# Altium PCB PCB.PcbDoc
Units mil, origin at the board's own origin, x right, y up, seen from the top; angles counter-clockwise.
Board outline 2500 x 2400 mil, 2 copper layers (Top Layer, Bottom Layer); 109 components, 42 nets, 290 pads, 50 vias.
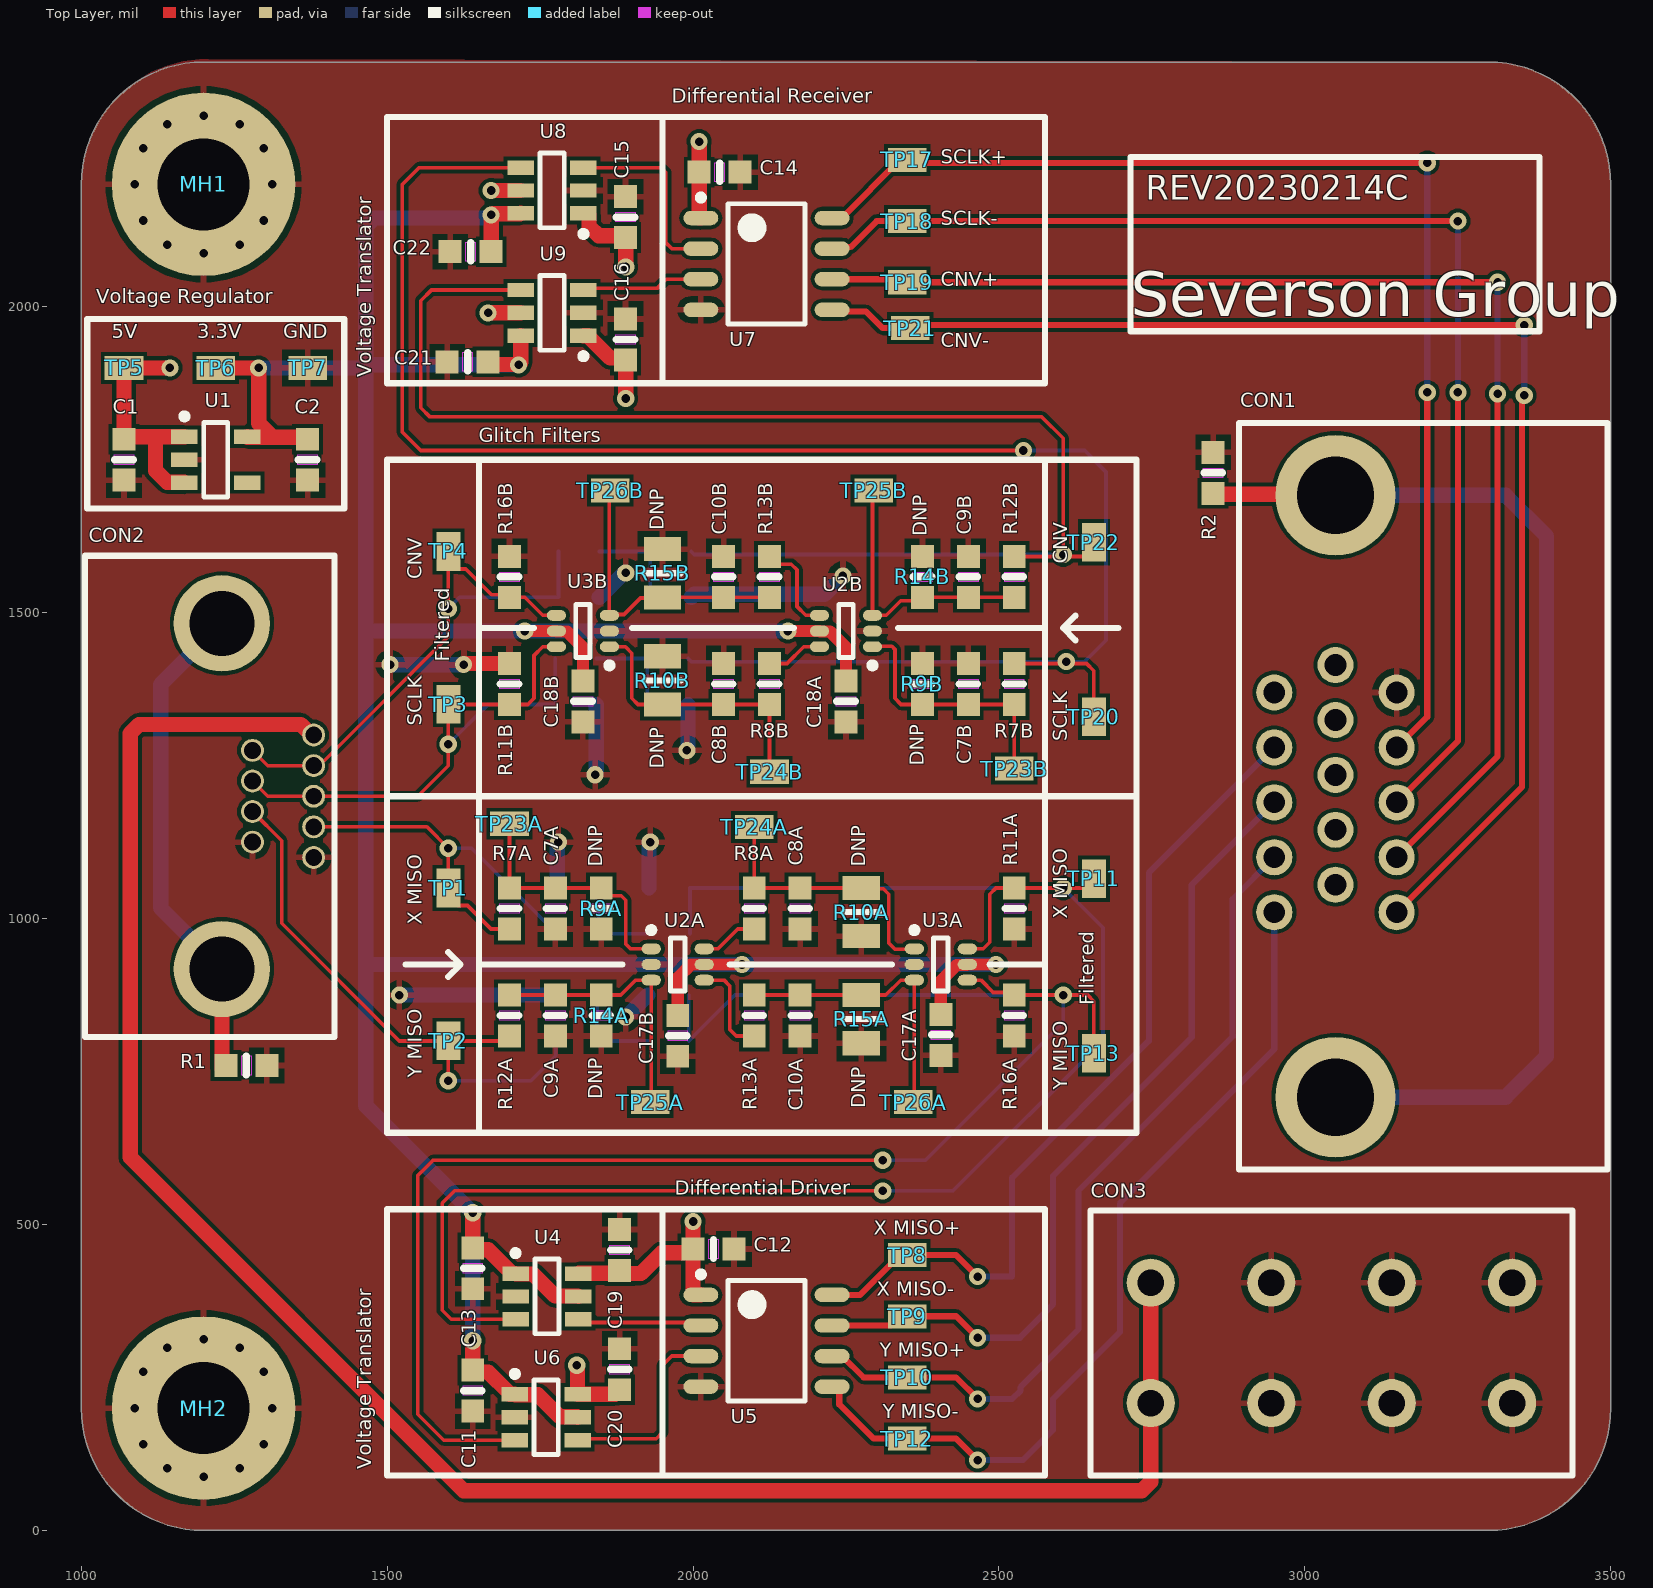
[diagram p0: Top Layer view]
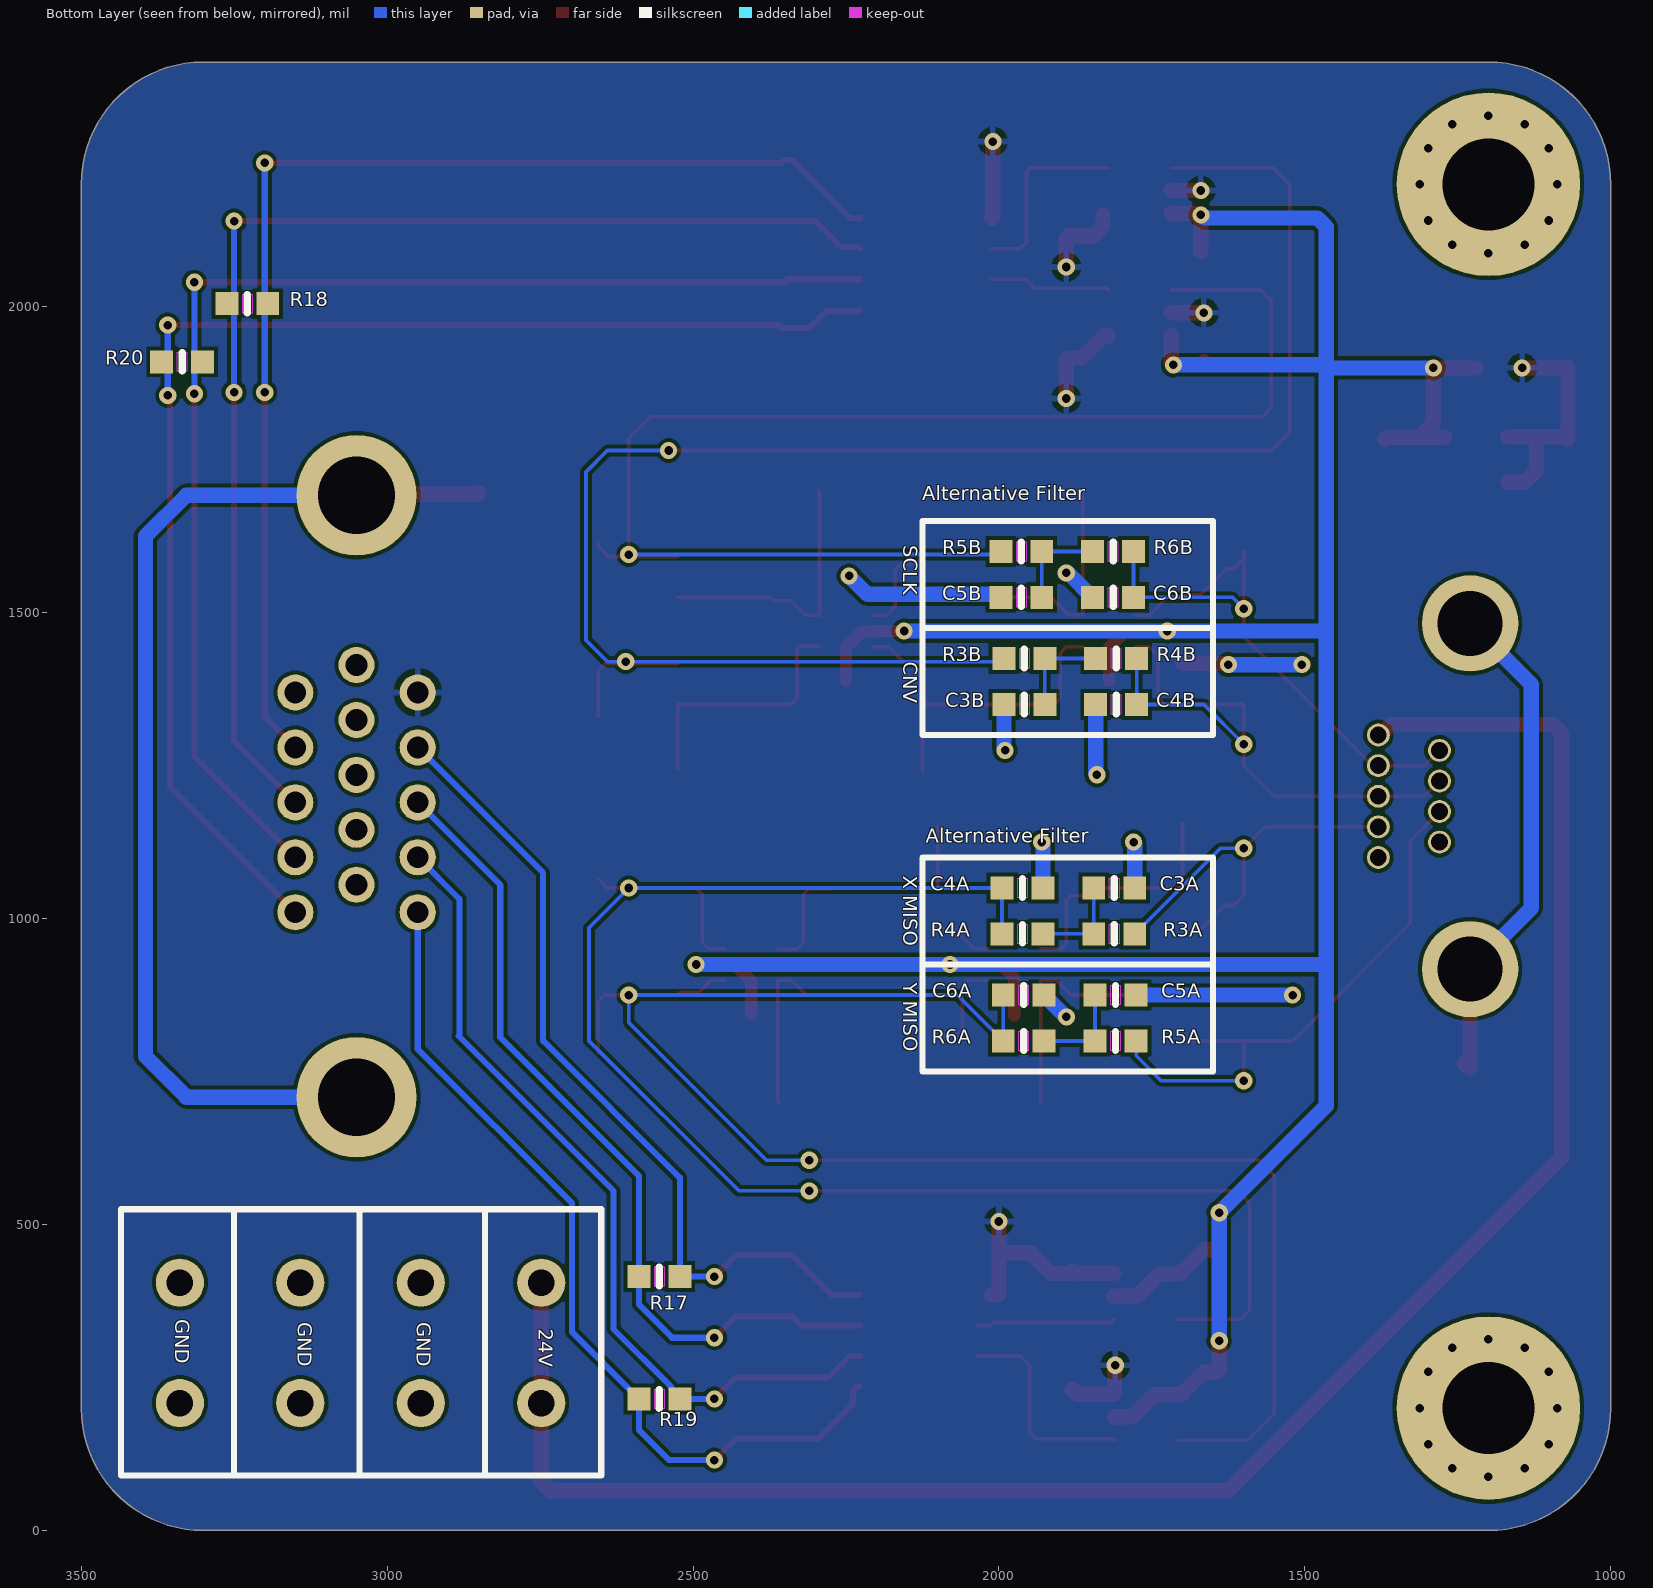
[diagram p1: Bottom Layer view, seen from below]
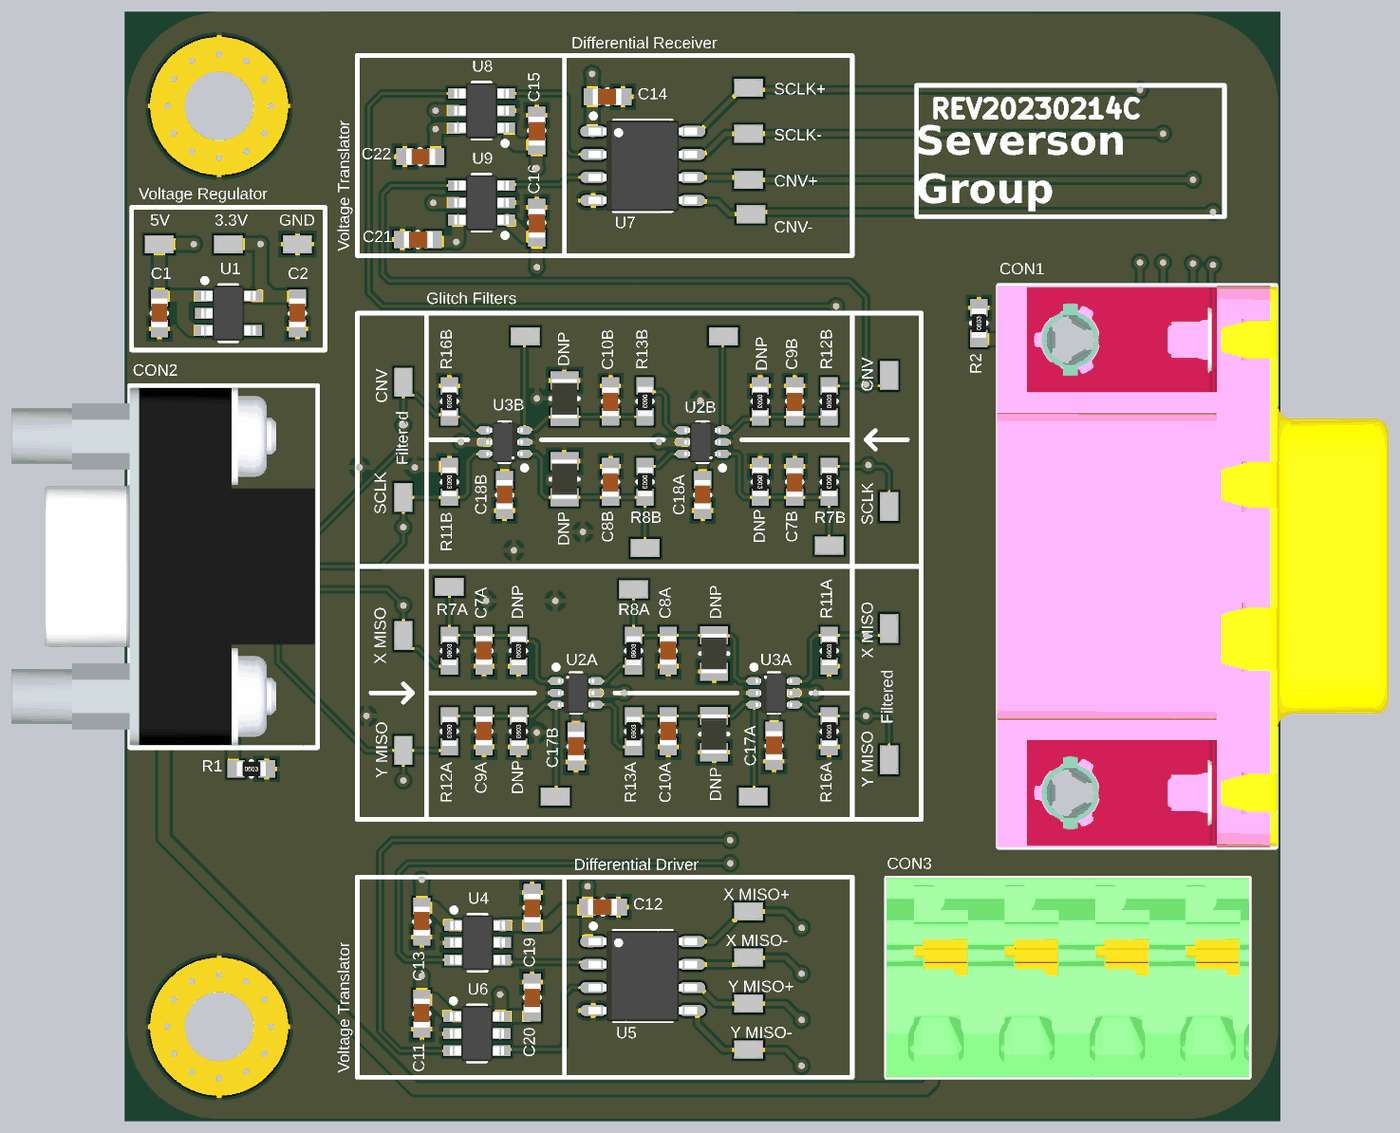
[diagram p2: 3D render of the assembled board from above, using the file's embedded part models]
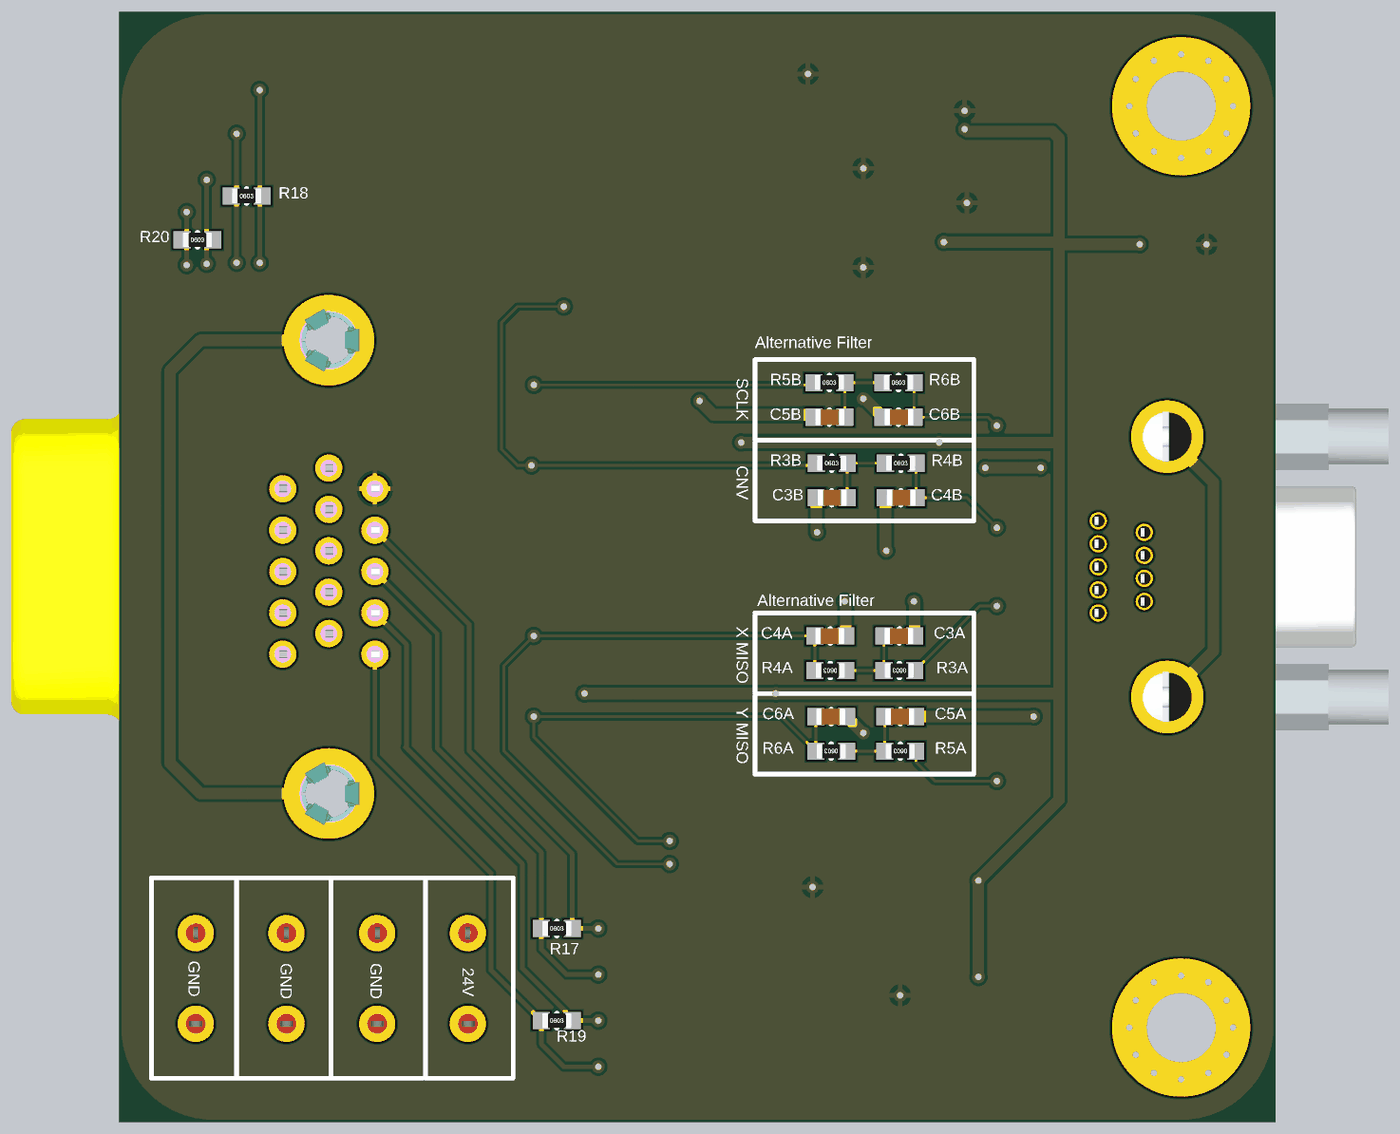
[diagram p3: 3D render of the assembled board from below, using the file's embedded part models]

## Layer stack, top to bottom
Top Solder: solder mask 0.4, Solder Resist, Dk 3.5
Top Layer: signal copper 1.4
Dielectric 1: dielectric 12.6, FR-4, Dk 4.8
Bottom Layer: signal copper 1.4
Bottom Solder: solder mask 0.4, Solder Resist, Dk 3.5

## Board outline
1000,200 1000,2200 cw(c1200,2200) 1200,2400 3300,2400 cw(c3300,2200) 3500,2200 3500,200 cw(c3300,200) 3300,0 1200,0 cw(c1200,200)

## Design rules (kind name [scope] priority, off if disabled: settings)
Clearance [All] p1: gap=6 ignorepadtopadclearanceinfootprint=FALSE except(0: Fill-Hole Poly-Hole Region-Hole Text-Hole)
DiffPairsRouting [All] p1: maxlimit=10 minlimit=10 mostfreqgap=10 toplayer_minwidth=10 toplayer_maxwidth=15 toplayer_prefwidth=10 bottomlayer_minwidth=10 bottomlayer_maxwidth=15 bottomlayer_prefwidth=10 maxuncoupledlength=500
HoleSize [All] p1: absolutevalues=TRUE maxlimit=500 minlimit=1 maxpercent=80.000 minpercent=20.000
MinimumSolderMaskSliver [All] p1: minsoldermaskwidth=3.9
PolygonConnect [All] p1: connectstyle=Relief reliefconductorwidth=10 reliefentries=4 polygonreliefangle="90 Angle" airgapwidth=10
RoutingVias [All] p1: holewidth=14 width=28 viastyle="Through Hole" minholewidth=14 minwidth=28 maxholewidth=150 maxwidth=200
SilkToSilkClearance [All] p1: silktosilkclearance=4
SilkToSolderMaskClearance [IsPad] p1: minsilkscreentomaskgap=4 clearancetoexposedcopper=TRUE
SolderMaskExpansion [All] p1: expansion=4 istentingtop=FALSE
Width [All] p1: maxlimit=50 minlimit=6 preferedwidth=6 minimp=50.000000 maximp=50.000000 favimp=50.000000
25 further rules are at their usual default settings.

## Classes and differential pairs
channel class IO_Filter: U_IO_FILTER_A U_IO_FILTER_B
component class U_IO_RECEIVER1: C14 C15 C16 C21 C22 TP17 TP18 TP19 TP20 TP21 TP22 U7 U8 U9
component class U_IO_FILTER_B: C3B C4B C5B C6B C7B C8B C9B C10B C17B C18B R3B R4B R5B R6B R7B R8B R9B R10B R11B R12B R13B R14B R15B R16B TP23B TP24B TP25B TP26B U2B U3B
component class U_IO_FILTER_A: C3A C4A C5A C6A C7A C8A C9A C10A C17A C18A R3A R4A R5A R6A R7A R8A R9A R10A R11A R12A R13A R14A R15A R16A TP23A TP24A TP25A TP26A U2A U3A
component class U_IO_DRIVER1: C11 C12 C13 C19 C20 TP5 TP6 TP7 TP8 TP9 TP10 TP11 TP12 TP13 U4 U5 U6
component class IO_Converter: C1 C2 CON1 CON2 CON3 MH1 MH2 R1 R2 R17 R18 R19 R20 TP1 TP2 TP3 TP4 U1
differential pair GP2_OUT: +GP2_OUT_P -GP2_OUT_N
differential pair GP2_IN: +GP2_IN_P -GP2_IN_N
differential pair GP1_OUT: +GP1_OUT_P -GP1_OUT_N
differential pair GP1_IN: +GP1_IN_P -GP1_IN_N

## Components (designator, comment, footprint, x,y, rotation, side; value= is the part's Value field where it differs from the comment)
C1 "CL10A105KP8NNWC" 0603-CAP 1070,1750 r90 top value=1uF
C2 "CL10A105KP8NNWC" 0603-CAP 1370,1750 r90 top value=1uF
C3A "DNP" 0603-CAP 1811.54,1050 r0 bottom (schematic designator C3)
C3B "DNP" 0603-CAP 1958.46,1350 r180 bottom (schematic designator C3)
C4A "DNP" 0603-CAP 1961.54,1050 r0 bottom (schematic designator C4)
C4B "DNP" 0603-CAP 1808.46,1350 r180 bottom (schematic designator C4)
C5A "DNP" 0603-CAP 1809.61,875 r0 bottom (schematic designator C5)
C5B "DNP" 0603-CAP 1963.46,1525 r180 bottom (schematic designator C5)
C6A "DNP" 0603-CAP 1959.61,875 r0 bottom (schematic designator C6)
C6B "DNP" 0603-CAP 1813.46,1525 r180 bottom (schematic designator C6)
C7A "CC0603BRNPO9BN1R0" 0603-CAP 1775,1016.54 r90 top value=1pF (schematic designator C7)
C7B "CC0603BRNPO9BN1R0" 0603-CAP 2450,1383.46 r270 top value=1pF (schematic designator C7)
C8A "CC0603JRNPO9BN160" 0603-CAP 2175,1016.54 r90 top value=16pF (schematic designator C8)
C8B "CC0603JRNPO9BN160" 0603-CAP 2050,1383.46 r270 top value=16pF (schematic designator C8)
C9A "CC0603BRNPO9BN1R0" 0603-CAP 1775,841.54 r90 top value=1pF (schematic designator C9)
C9B "CC0603BRNPO9BN1R0" 0603-CAP 2450,1558.46 r270 top value=1pF (schematic designator C9)
C10A "CC0603JRNPO9BN160" 0603-CAP 2175,841.54 r90 top value=16pF (schematic designator C10)
C10B "CC0603JRNPO9BN160" 0603-CAP 2050,1558.46 r270 top value=16pF (schematic designator C10)
C11 "CC0603KRX7R8BB104" 0603-CAP 1640,228.46 r90 top value=0.1uF
C12 "CC0603KRX7R8BB104" 0603-CAP 2033.46,460 r180 top value=0.1uF
C13 "CC0603KRX7R8BB104" 0603-CAP 1640,428.46 r90 top value=0.1uF
C14 "CC0603KRX7R8BB104" 0603-CAP 2043.46,2220 r180 top value=0.1uF
C15 "CC0603KRX7R8BB104" 0603-CAP 1889.68,2146.54 r270 top value=0.1uF
C16 "CC0603KRX7R8BB104" 0603-CAP 1889.68,1946.54 r270 top value=0.1uF
C17A "CC0603KRX7R8BB104" 0603-CAP 2405,810 r90 top value=0.1uF (schematic designator C17)
C17B "CC0603KRX7R8BB104" 0603-CAP 1975,808.46 r90 top value=0.1uF (schematic designator C17)
C18A "CC0603KRX7R8BB104" 0603-CAP 2250,1355 r90 top value=0.1uF (schematic designator C18)
C18B "CC0603KRX7R8BB104" 0603-CAP 1820,1355 r90 top value=0.1uF (schematic designator C18)
C19 "CC0603KRX7R8BB104" 0603-CAP 1880,458.46 r270 top value=0.1uF
C20 "CC0603KRX7R8BB104" 0603-CAP 1880,263.46 r270 top value=0.1uF
C21 "CC0603KRX7R8BB104" 0603-CAP 1631.54,1910 r0 top value=0.1uF
C22 "CC0603KRX7R8BB104" 0603-CAP 1636.54,2090 r0 top value=0.1uF
CON1 "ICD15S13E6GX00LF" ICD15S13E6GX00LF 3050,1200 r90 top locked
CON2 "381-009-112L565" 381-009-112L565 1380,1200 r270 top
CON3 "1862291" 1862291 2748.15,405 r0 top
MH1 "MOUNT_HOLE" MOUNTING_HOLE 1200,2200 r0 top
MH2 "MOUNT_HOLE" MOUNTING_HOLE 1200,200 r0 top
R1 "Resistor" 0603-RES 1270,760 r0 top value=DNP
R2 "Resistor" 0603-RES 2850,1728.46 r90 top value=DNP
R3A "DNP" 0603-RES 1811.54,975 r0 bottom (schematic designator R3)
R3B "DNP" 0603-RES 1958.46,1425 r180 bottom (schematic designator R3)
R4A "DNP" 0603-RES 1961.54,975 r0 bottom (schematic designator R4)
R4B "DNP" 0603-RES 1808.46,1425 r180 bottom (schematic designator R4)
R5A "DNP" 0603-RES 1809.61,800 r0 bottom (schematic designator R5)
R5B "DNP" 0603-RES 1963.46,1600 r180 bottom (schematic designator R5)
R6A "DNP" 0603-RES 1959.61,800 r0 bottom (schematic designator R6)
R6B "DNP" 0603-RES 1813.46,1600 r180 bottom (schematic designator R6)
R7A "RT0603DRE0710KL" 0603-RES 1700,1016.54 r90 top value=10K (schematic designator R7)
R7B "RT0603DRE0710KL" 0603-RES 2525,1383.46 r270 top value=10K (schematic designator R7)
R8A "RT0603DRE0710KL" 0603-RES 2100,1016.54 r90 top value=10K (schematic designator R8)
R8B "RT0603DRE0710KL" 0603-RES 2125,1383.46 r270 top value=10K (schematic designator R8)
R9A "RT0603DRE0710KL" 0603-RES 1850,1016.54 r90 top value=10K (schematic designator R9)
R9B "RT0603DRE0710KL" 0603-RES 2375,1383.46 r270 top value=10K (schematic designator R9)
R10A "CPF-A-0805B25KE" RESC2012X06N 2275,1010.63 r90 top value=25K (schematic designator R10)
R10B "CPF-A-0805B25KE" RESC2012X06N 1950,1389.37 r270 top value=25K (schematic designator R10)
R11A "RT0603DRE0710KL" 0603-RES 2525,1016.54 r90 top value=10K (schematic designator R11)
R11B "RT0603DRE0710KL" 0603-RES 1700,1383.46 r270 top value=10K (schematic designator R11)
R12A "RT0603DRE0710KL" 0603-RES 1700,841.54 r270 top value=10K (schematic designator R12)
R12B "RT0603DRE0710KL" 0603-RES 2525,1558.46 r90 top value=10K (schematic designator R12)
R13A "RT0603DRE0710KL" 0603-RES 2100,841.54 r90 top value=10K (schematic designator R13)
R13B "RT0603DRE0710KL" 0603-RES 2125,1558.46 r270 top value=10K (schematic designator R13)
R14A "RT0603DRE0710KL" 0603-RES 1850,841.54 r90 top value=10K (schematic designator R14)
R14B "RT0603DRE0710KL" 0603-RES 2375,1558.46 r270 top value=10K (schematic designator R14)
R15A "CPF-A-0805B25KE" RESC2012X06N 2275,835.63 r90 top value=25K (schematic designator R15)
R15B "CPF-A-0805B25KE" RESC2012X06N 1950,1564.37 r270 top value=25K (schematic designator R15)
R16A "RT0603DRE0710KL" 0603-RES 2525,841.54 r90 top value=10K (schematic designator R16)
R16B "RT0603DRE0710KL" 0603-RES 1700,1558.46 r270 top value=10K (schematic designator R16)
R17 "" 0603-RES 2555,415 r180 bottom value=120
R18 "" 0603-RES 3228.46,2005 r180 bottom value=120
R19 "" 0603-RES 2555,215 r180 bottom value=120
R20 "" 0603-RES 3335,1910 r180 bottom value=120
TP1 "RCU-0C" RCU-0C 1600,1050 r0 top
TP2 "RCU-0C" RCU-0C 1600,800 r180 top
TP3 "RCU-0C" RCU-0C 1600,1350 r180 top
TP4 "RCU-0C" RCU-0C 1600,1600 r180 top
TP5 "RCU-0C" RCU-0C 1070,1900 r90 top
TP6 "RCU-0C" RCU-0C 1220,1900 r90 top
TP7 "RCU-0C" RCU-0C 1370,1900 r90 top
TP8 "RCU-0C" RCU-0C 2350,450 r90 top
TP9 "RCU-0C" RCU-0C 2350,350 r90 top
TP10 "RCU-0C" RCU-0C 2350,250 r90 top
TP11 "RCU-0C" RCU-0C 2655,1065 r180 top
TP12 "RCU-0C" RCU-0C 2350,150 r90 top
TP13 "RCU-0C" RCU-0C 2655,780 r180 top
TP17 "RCU-0C" RCU-0C 2350,2240 r270 top
TP18 "RCU-0C" RCU-0C 2350,2140 r270 top
TP19 "RCU-0C" RCU-0C 2350,2040 r270 top
TP20 "RCU-0C" RCU-0C 2655,1330 r0 top
TP21 "RCU-0C" RCU-0C 2354.72,1965 r270 top
TP22 "RCU-0C" RCU-0C 2655,1615 r0 top
TP23A "RCU-0C" RCU-0C 1700,1155 r90 top (schematic designator TP23)
TP23B "RCU-0C" RCU-0C 2525,1245 r90 top (schematic designator TP23)
TP24A "RCU-0C" RCU-0C 2100,1150 r90 top (schematic designator TP24)
TP24B "RCU-0C" RCU-0C 2125,1240 r90 top (schematic designator TP24)
TP25A "RCU-0C" RCU-0C 1930,700 r90 top (schematic designator TP25)
TP25B "RCU-0C" RCU-0C 2295,1700 r270 top (schematic designator TP25)
TP26A "RCU-0C" RCU-0C 2360,700 r90 top (schematic designator TP26)
TP26B "RCU-0C" RCU-0C 1865,1700 r270 top (schematic designator TP26)
U1 "TLV75533PDBVR" SOT95P280X145-5N 1220,1750 r0 top
U2A "74LVC2G14GW-Q100H" TSOP65P210X110-6N 1975,925 r0 top (schematic designator U2)
U2B "74LVC2G14GW-Q100H" TSOP65P210X110-6N 2250,1470 r180 top (schematic designator U2)
U3A "74LVC2G14GW-Q100H" TSOP65P210X110-6N 2405,925 r0 top (schematic designator U3)
U3B "74LVC2G14GW-Q100H" TSOP65P210X110-6N 1820,1470 r180 top (schematic designator U3)
U4 "SN74LVC1T45DBVR" SOT95P280X145-6N 1761.18,382.4 r0 top
U5 "UA9638CDR" SOIC127P600X175-8N 2120,310 r0 top
U6 "SN74LVC1T45DBVR" SOT95P280X145-6N 1760,185 r0 top
U7 "UA9637ACDR" SOIC127P600X175-8N 2120,2070 r0 top
U8 "SN74LVC1T45DBVR" SOT95P280X145-6N 1769.68,2190 r180 top
U9 "SN74LVC1T45DBVR" SOT95P280X145-6N 1769.68,1990 r180 top

## Footprints (in the part's own frame and the unit in brackets; to place one, negate y for a bottom-side part, rotate by r counter-clockwise, add the part's x,y. Pads: shape width x height; smd on the part's side, far side on the other; paste and mask are expansions set on the pad)
381-009-112L565 [mm]
  round 0.95 hole 0.7: 1(-2.54,0) 2(-1.27,0) 3(0,0) 4(1.27,0) 5(2.54,0) 6(-1.905,-2.54) 7(-0.635,-2.54) 8(0.635,-2.54) 9(1.905,-2.54)
  round 4 hole 2.69: SH1(-7.175,-3.81) SH2(7.175,-3.81)
  silkscreen extent -9.98,-9.5 10,0.86, body extent -9.84,-16.01 9.84,0.7, height 7.85
0603-CAP [mm]
  rect 0.95x0.95 smd: 1(-0.85,0) 2(0.85,0)
  Top Layer keep-out region: -0.2,0.4 0.2,0.4 0.2,-0.4 -0.2,-0.4
  silkscreen extent 0,-0.38 0,0.38, body extent -0.77,-0.45 0.83,0.45, height 0.78
0603-RES [mm]
  rect 0.95x0.95 smd: 1(-0.85,0) 2(0.85,0)
  Top Layer keep-out region: -0.2,0.4 0.2,0.4 0.2,-0.4 -0.2,-0.4
  silkscreen extent 0,-0.38 0,0.38, body extent -0.8,-0.4 0.8,0.4, height 0.44
1862291 [mm]
  round 2 hole 1.1: 1(0,-5) 1(0,0) 2(5,-5) 2(5,0) 3(10,-5) 3(10,0) 4(15,-5) 4(15,0)
  silkscreen extent -2.5,-8 17.5,3, body extent -2.5,-8 17.5,3, height 8
ICD15S13E6GX00LF [mm] "CONN DSUB HD RCPT 15POS R/A SLDR"
  round 1.5 hole 0.9: 1(4.305,2.54) 2(2.025,2.54) 3(-0.255,2.54) 4(-2.535,2.54) 5(-4.815,2.54) 6(5.445,0) 7(3.165,0) 8(0.885,0) 9(-1.395,0) 10(-3.675,0) 11(4.305,-2.54) 12(2.025,-2.54) 13(-0.255,-2.54) 14(-2.535,-2.54) 15(-4.815,-2.54)
  round 5 hole 3.2: SH1(12.495,0) SH2(-12.495,0)
  silkscreen extent -15.5,-11.3 15.5,4, body extent -15.5,-17.5 15.5,4.08, height 12.65
MOUNTING_HOLE [mil]
  round 30 hole 14: 1(-112.5,0) 1(-98.43,-59.06) 1(-98.43,59.06) 1(-59.06,-98.43) 1(-59.06,98.43) 1(0,-112.5) 1(0,112.5) 1(59.06,-98.43) 1(59.06,98.43) 1(98.43,-59.06) 1(98.43,59.06) 1(112.5,0)
  round 300 hole 150: 1(0,0)
RCU-0C [mm] "0603 PROBE PAD"
  rect 1x1.6 smd: 1(0,0)
  body extent -0.44,-0.8 0.46,0.8, height 1.12
RESC2012X06N [mm] "Chip Resistor, 2-Leads, Body 2.00x1.25mm, IPC Medium Density"
  rect 1x1.55 smd: 1(-1,0) 2(1,0)
  silkscreen extent 0,-0.76 0,0.76, body extent -1.07,-0.7 1.07,0.7, height 0.65
SOIC127P600X175-8N [mm] "SOIC, 8-Leads, Body 4.91x3.90mm, Pitch 1.27mm, IPC Medium Density"
  oval 1.45x0.6 smd: 1(-2.725,1.905) 2(-2.725,0.635) 3(-2.725,-0.635) 4(-2.725,-1.905) 5(2.725,-1.905) 6(2.725,-0.635) 7(2.725,0.635) 8(2.725,1.905)
  silkscreen extent -2.85,-2.5 1.6,2.88, body extent -3,-2.5 3,2.5, height 1.75
SOT95P280X145-5N [mm] "SOT23, 5-Leads, Body 2.90x2.80mm, Pitch 0.95mm, IPC Medium Density"
  rect 1.1x0.6 smd mask+0.07: 1(-1.3,0.95) 2(-1.3,0) 3(-1.3,-0.95) 4(1.3,-0.95) 5(1.3,0.95)
  silkscreen extent -1.42,-1.55 0.5,1.92, body extent -1.5,-1.53 1.5,1.53, height 1.45
SOT95P280X145-6N [mm] "SOT23, 6-Leads, Body 2.90x2.80mm, Pitch 0.95mm, IPC Medium Density"
  rect 1.1x0.6 smd mask+0.07: 1(-1.3,0.95) 2(-1.3,0) 3(-1.3,-0.95) 4(1.3,-0.95) 5(1.3,0) 6(1.3,0.95)
  silkscreen extent -1.42,-1.55 0.5,1.92, body extent -1.5,-1.53 1.5,1.53, height 1.45
TSOP65P210X110-6N [mm] "TSOP, 6-Leads, Body 2.00x1.25mm, Pitch 0.65mm, IPC Medium Density"
  oval 0.8x0.45 smd mask+0.05: 1(-1.1,0.65) 2(-1.1,0) 3(-1.1,-0.65) 4(1.1,-0.65) 5(1.1,0) 6(1.1,0.65)
  silkscreen extent -1.22,-1.1 0.3,1.55, body extent -1.04,-1.1 1.04,1.1, height 1.1

## Part data
C1 C2: library part "Capacitor 1uF", "CAP CER 1UF 10V X5R 0603", Supplier Part Number 1=1276-1863-1-ND, Supplier 1=Digi-Key
C3A C3B C4A C4B C5A C5B C6A C6B: library part Capacitor
C7A C7B C9A C9B: library part "Capacitor 1pF", "±0.1pF 50V Ceramic Capacitor C0G, NP0 0603 (1608 Metric)", Supplier Part Number 1=311-3346-1-ND, Supplier 1=DigiKey
C8A C8B C10A C10B: library part "Capacitor 16pF", "±5% 50V Ceramic Capacitor C0G, NP0 0603 (1608 Metric)", Supplier Part Number 1=311-3964-1-ND, Supplier 1=DigiKey
C11 C12 C13 C14 C15 C16 C17A C17B C18A C18B C19 C20 C21 C22: library part "Capacitor 0.1uF", "0.1µF ±10% 25V Ceramic Capacitor X7R 0603 (1608 Metric)", Supplier Part Number 1=311-1341-1-ND, Supplier 1=Digi-Key
CON1: "15 Position D-Sub, High Density Receptacle, Female Sockets Connector", Supplier Part Number 1=609-2801-ND, Supplier 1=Digi-Key
CON2: "9 Position D-Type, Micro-D Plug, Male Pins Connector", Supplier Part Number 1=NOR1136-ND, Supplier 1=DigiKey
CON3: "TERM BLOCK 4POS 45DEG 5MM PCB", Supplier Part Number 1=277-12141-ND, Supplier 1=DigiKey
MH1 MH2: "MOUNTING HOLE"
R1 R2: "DNP", Supplier 1=Digi-Key
R3A R3B R4A R4B R5A R5B R6A R6B: library part Resistor
R7A R7B R8A R8B R9A R9B R11A R11B R12A R12B R13A R13B R14A R14B R16A R16B: library part "Resisitor 10K", "10 ±0.5% 0.1W, 1/10W Chip Resistor 0603 (1608 Metric) - Thin Film", Supplier Part Number 1=YAG2318CT-ND, Supplier 1=DigiKey
R10A R10B R15A R15B: library part "Resistor 25K", "25 ±0.1% 0.1W, 1/10W Chip Resistor 0805 (2012 Metric) Anti-Sulfur, Automotive AEC-Q200, Moisture Resistant Thin Film", Supplier Part Number 1=1712-CPF-A-0805B25KECT-ND, Supplier 1=DigiKey
R17 R18 R19 R20: library part Resistor, "DNP"
TP1 TP2 TP3 TP4 TP5 TP6 TP7 TP8 TP9 TP10 TP11 TP12 TP13 TP17 TP18 TP19 TP20 TP21 TP22 TP23A TP23B TP24A TP24B TP25A TP25B TP26A TP26B: library part "Test Point", "PC TEST POINT NATURAL", Color=Natural, Supplier Part Number 1=A106145CT-ND, Category="Test and Measurement", ComponentLink1Description=http://www.te.com/commerce/DocumentDelivery/DDEController?Action=srchrtrv&DocNm=1773266&DocType=DS&DocLang=English, ComponentLink1URL=http://www.te.com/commerce/DocumentDelivery/DDEController?Action=srchrtrv&DocNm=1773266&DocType=DS&DocLang=English, Manufacturer Part Number=RCU-0C, Material - Body=-, Material - Insulation="No Insulation", Mounting Type="Surface Mount", Packaging="Cut Tape (CT)", Part Status=Active, Plating=-, Pricing 1="1=0.22, 10=0.206, 25=0.1756, 50=0.1536, 100=0.1426, 250=0.12616, 500=0.12068, 1000=0.09874 (USD)", RoHS="RoHS Compliant", Size / Dimension="0.063\" x 0.031\" x 0.045\" (1.60mm x 0.80mm x 1.15mm)", Stock 1=136646, Supplier 1=Digi-Key, Type="PC Test Point"
U1: "IC REG LINEAR 3.3V 500MA SOT23-5", Supplier Part Number 1=296-50411-1-ND, Supplier 1=Digi-Key
U2A U2B U3A U3B: "Inverter IC 2 Channel Schmitt Trigger SOT-363", Supplier Part Number 1=1727-2072-1-ND, Supplier 1=DigiKey
U4 U6 U8 U9: "IC TRNSLTR BIDIRECTIONAL SOT23-6", Supplier Part Number 1=296-16843-1-ND, Supplier 1=Digi-Key
U5: "IC DRIVER 2/0 8SOIC", Supplier Part Number 1=296-15058-1-ND, Supplier 1=DigiKey
U7: "IC RECEIVER 0/2 8SOIC", Supplier Part Number 1=296-15056-1-ND, Supplier 1=DigiKey

## Via types
v1: diameter 28, hole 14, Top Layer to Bottom Layer, tented both sides, 50 vias

## Nets (pads, with @x,y where several pads share a name; then routed paths per layer and width w, separated by ;. In a path a pad name is that pad's centre, name@x,y a point inside that pad or via, vN(x,y) a via of type N, cw(c..) or ccw(c..) an arc to the next point about the centre after c; other vN are vias at no path point)
3.3V: C2.2 C11.2 C13.2 C17A.2 C17B.2 C18A.2 C18B.2 C21.2 C22.2 TP6.1 U1.5 U2A.5 U2B.5 U3A.5 U3B.5 U4.1 U4.5 U6.1 U6.5 U8.6 U9.6 | length 5923.7
  Top Layer w20: v1(1725,1470) U3B.5 1777.43,1469.27 1793.88,1469.27 1820,1443.15 C18B.2 ; C17B.2 1975,903.28 1996.72,925 U2A.5 v1(2080,925) ; v1(2155,1470) U2B.5 2207.43,1469.27 2223.88,1469.27 2250,1443.15 C18A.2 ; C17A.2 2405,898.15 2431.12,924.27 2447.57,924.27 U3A.5 v1(2495,925)
  Top Layer w25: TP6.1 v1(1290,1900) 1290.42,1899.58 1290.42,1809.6 1313.31,1786.71 ; U1.5 1271.87,1786.71 1313.31,1786.71 ; C2.2 1366.75,1786.71 1313.31,1786.71 ; v1(1640,310) C11.2 1643.09,258.84 1665.07,258.84 1699.67,224.24 1699.67,223.09 1700.35,222.4 U6.1 1709.51,221.71 1746.59,221.71 1782.61,185.69 1810.49,185.69 U6.5 ; v1(1640,519.19) C13.2 1643.09,458.84 1665.07,458.84 1700.85,423.06 1700.85,420.49 1701.54,419.8 U4.1 1710.69,419.11 1738.57,419.11 1774.6,383.09 1811.67,383.09 U4.5 ; C21.2 1669.43,1905.57 1714.43,1905.57 v1(1715,1905) 1715,1905.81 1718.5,1909.32 U9.6 ; C22.2 v1(1670,2150) 1670.81,2150 1672.72,2151.91 1717.81,2151.91 U8.6
  Bottom Layer w25: v1(1290,1900) 1465,1900 ; 1465,1905 v1(1715,1905) ; v1(1640,310) v1(1640,519.19) 1465,694.19 1465,925 ; v1(1670,2150) 1669.19,2150 1664.19,2145 1479.64,2145 1465,2130.36 1465,1900 ; v1(2155,1470) v1(1725,1470) 1465,1470 ; v1(2495,925) v1(2080,925) 1465,925 ; 1465,925 1465,1470 ; 1465,1470 1465,1900
5V: C1.2 C12.2 C14.2 C15.2 C16.2 C19.2 C20.2 CON1.1 TP5.1 U1.1 U1.3 U4.6 U5.1 U6.6 U7.1 U8.1 U8.5 U9.1 U9.5 | length 1384.4
  Top Layer w25: v1(1145,1900) TP5.1 C1.2 1073.94,1787.4 1121.38,1787.4 ; U1.3 1168.13,1713.29 1140.25,1713.29 1121.38,1732.16 1121.38,1787.4 ; U1.1 1121.38,1787.4 ; v1(1665,1990) U9.5 ; v1(1670,2190) U8.5 ; v1(1810,270) 1810,269.19 1811.18,268.01 U6.6 1872.4,222.4 C20.2 ; U4.6@1820.83,419.8 U4.6 1813.05,420.49 1875.49,420.49 C19.2 1885,420 1915,420 1948.8,453.8 1993.8,453.8 C12.2 ; U9.1 1829.33,1952.6 1830.02,1951.91 1830.02,1950.76 1864.62,1916.16 1886.59,1916.16 C16.2 1889.84,1912.91 1889.84,1850.16 v1(1890,1850) ; U8.1@1830.02,2150 1830.02,2131.5 1845.35,2116.16 1886.59,2116.16 C15.2 1889.84,2112.91 1889.84,2065.16 v1(1890,2065) ; v1(2000,505) C12.2 ; v1(2010,2270) C14.2 2010,2145.69 2010.69,2145 U7.1 ; U5.1 2000.69,385 2000,385.69 C12.2
GND: C1.1 C2.1 C3A.1 C3B.1 C4A.1 C4B.1 C5A.1 C5B.1 C6A.1 C6B.1 C7A.1 C7B.1 C8A.1 C8B.1 C9A.1 C9B.1 C10A.1 C10B.1 C11.1 C12.1 C13.1 C14.1 C15.1 C16.1 C17A.1 C17B.1 C18A.1 C18B.1 C19.1 C20.1 C21.1 C22.1 CON1.11 CON2.5 CON2.9 CON3.2 CON3.3 CON3.4 MH1.1 MH2.1 R1.2 R2.2 R9A.1 R9B.1 R10A.1 R10B.1 R11A.1 R11B.1 R14A.1 R14B.1 R15A.1 R15B.1 R16A.1 R16B.1 TP7.1 U1.2 U2A.2 U2B.2 U3A.2 U3B.2 U4.2 U5.4 U6.2 U7.4 U8.2 U9.2 | length 1168.5
  Top Layer w25: v1(1625,1415) 1625.81,1415 1627.74,1416.93 R11B.1
  Bottom Layer w25: v1(1505,1415) v1(1625,1415) ; v1(1520,875) C5A.1 ; C3A.1 1778.07,1122.26 1780,1124.19 v1(1780,1125) ; v1(1840,1235) 1840,1235.81 1841.93,1237.74 C4B.1 ; C6B.1 1886.36,1564.43 1889.43,1564.43 v1(1890,1565) ; v1(1889.75,839.33) 1890.47,839.33 C6A.1 ; C4A.1 1928.07,1122.26 1930,1124.19 v1(1930,1125) ; v1(1990,1275) 1990,1275.81 1991.93,1277.74 C3B.1 ; C5B.1 2001.93,1530 2215,1530 v1(2245,1560)
GP1_IN_N: CON1.3 R17.1 TP9.1 U5.7 | length 1374.8
  Top Layer w10: U5.7 2323.19,335 2338.19,350 TP9.1 2430,350 v1(2465,315)
  Bottom Layer w10: v1(2465,315) 2534.13,315 2588.46,369.34 R17.1 2588.46,579.52 2815,806.05 2815,1054.96 CON1.3
GP1_IN_P: CON1.2 R17.2 TP8.1 U5.8 | length 1377.9
  Top Layer w10: U5.8 2273.19,385 2338.19,450 TP8.1 2430,450 v1(2465,415)
  Bottom Layer w10: v1(2465,415) R17.2 2521.54,576.54 2745,800 2745,1074.72 CON1.2
GP1_OUT_N: CON1.13 R18.1 TP18.1 U7.7 | length 2032.8
  Top Layer w10: U7.7 2229.89,2097.61 2257.61,2097.61 2300,2140 TP18.1 v1(3250,2140) ; CON1.13 3250,1289.96 v1(3250,1860)
  Bottom Layer w10: v1(3250,1860) v1(3250,2140)
GP1_OUT_P: CON1.12 R18.2 TP17.1 U7.8 | length 1990.1
  Top Layer w10: U7.8 2243.19,2145 2338.19,2240 TP17.1 2355,2235 v1(3200,2235) ; CON1.12 3200,1329.72 v1(3200,1860)
  Bottom Layer w10: v1(3200,1860) v1(3200,2235)
GP2_IN_N: CON1.5 R19.1 TP12.1 U5.5 | length 1440.5
  Top Layer w10: U5.5 2232.72,235 2239.02,228.71 2239.02,205.98 2295,150 TP12.1 2430,150 v1(2465,115)
  Bottom Layer w10: v1(2465,115) 2539.18,115 2588.46,164.29 R19.1 2697.78,324.31 2697.78,534.63 2950,786.85 CON1.5
GP2_IN_P: CON1.4 R19.2 TP10.1 U5.6 | length 1384.9
  Top Layer w10: U5.6 2244.02,285 2279.02,250 TP10.1 2430,250 v1(2465,215)
  Bottom Layer w10: v1(2465,215) R19.2 2535.24,228.7 2535.24,233.67 2536.13,234.56 2536.13,235.3 2630,329.18 2630,555 2883.33,808.33 ; 2881.67,810 2881.67,1031.86 CON1.4
GP2_OUT_N: CON1.15 R20.1 TP21.1 U7.5 | length 2306.7
  Top Layer w10: U7.5 2229.89,1992.39 2282.61,1992.39 2310,1965 TP21.1 2359.72,1970 v1@3355,1970 ; CON1.15 3355,1215.43 v1@3355,1855
  Bottom Layer w10: v1(3358.46,1855) v1(3358.46,1970) ; v1(3358.46,1970) 3358.46,1910 v1(3358.46,1970)
GP2_OUT_P: CON1.14 R20.2 TP19.1 U7.6 | length 2097.9
  Top Layer w10: U7.6 2345,2045 TP19.1 v1(3315,2040) ; CON1.14 3315,1265.2 v1(3315,1857.82)
  Bottom Layer w10: v1(3315,1857.82) v1(3315,2040)
NetC3A_2: C3A.2 R3A.2 R4A.1 | length 158.1
  Bottom Layer w6: C3A.2 R3A.2 R4A.1
NetC3B_2: C3B.2 R3B.2 R4B.1 | length 158.1
  Bottom Layer w6: R4B.1 R3B.2 C3B.2
NetC4A_2: C4A.2 R4A.2 R11A.2 TP11.1 U3A.6 U4.3 | length 2753.2
  Top Layer w6: U4.3 1605,345 1590,360 1590,535 1610,555 v1(2310,555) ; U3A.6 2474.42,950.59 2485,961.17 2485,1040 2495,1050 R11A.2 v1(2605,1050) 2640,1050 TP11.1
  Bottom Layer w6: R4A.2 C4A.2 v1(2605,1050) 2670,985 2670,800 2425,555 v1(2310,555)
NetC5A_2: C5A.2 R5A.2 R6A.1 | length 158.1
  Bottom Layer w6: C5A.2 R5A.2 R6A.1
NetC5B_2: C5B.2 R5B.2 R6B.1 | length 158.1
  Bottom Layer w6: R6B.1 R5B.2 C5B.2
NetC6A_2: C6A.2 R6A.2 R16A.2 TP13.1 U3A.4 U6.3 | length 2794
  Top Layer w6: U6.3 1592.4,147.6 1550,190 1550,580 1575,605 v1(2310,605) ; U3A.4 2448.4,899.5 2470.5,899.5 2490.81,879.19 2520.81,879.19 R16A.2 v1(2605,875) 2645,875 2655,865 TP13.1
  Bottom Layer w6: C6A.2 R6A.2 2068.07,875 v1(2605,875) 2605,830 2380,605 v1(2310,605)
NetC7A_2: C7A.2 R7A.2 R9A.2 TP23A.1 U2A.1 | length 419.7
  Top Layer w6: TP23A.1 R7A.2 C7A.2 R9A.2 1862.59,1037.41 1882.59,1037.41 1890,1030 1890,958.51 1897.92,950.59 U2A.1
NetC7B_2: C7B.2 R7B.2 R9B.2 TP23B.1 U2B.1 | length 423.2
  Top Layer w6: U2B.1 2293.9,1445 2325,1445 2330,1440 2330,1360 2340,1350 R9B.2 C7B.2 R7B.2 TP23B.1
NetC8A_2: C8A.2 R8A.2 R10A.2 TP24A.1 U3A.1 | length 450.2
  Top Layer w6: TP24A.1 R8A.2 C8A.2 R10A.2 2276,1049 2311,1049 2320,1040 2320,960 2330,950 2361.1,950 U3A.1
NetC8B_2: C8B.2 R8B.2 R10B.2 TP24B.1 U3B.1 | length 454
  Top Layer w6: U3B.1 1889.42,1444.41 1900,1433.83 1900,1360 1910,1350 R10B.2 C8B.2 R8B.2 TP24B.1
NetC9A_2: C9A.2 R12A.1 R14A.2 TP25A.1 U2A.3 | length 441.9
  Top Layer w6: R12A.1 C9A.2 R14A.2 1881.65,875 1906.06,899.41 U2A.3 1931.69,701.69 TP25A.1
NetC9B_2: C9B.2 R12B.1 R14B.2 TP25B.1 U2B.3 | length 449
  Top Layer w6: TP25B.1 2293.31,1698.31 U2B.3 2315.59,1495.59 2339.56,1519.56 2369.56,1519.56 R14B.2 C9B.2 R12B.1
NetC10A_2: C10A.2 R13A.2 R15A.2 TP26A.1 U3A.3 | length 471.9
  Top Layer w6: R13A.2 C10A.2 R15A.2 2315,875 2339.41,899.41 U3A.3 2361.69,701.69 TP26A.1
NetC10B_2: C10B.2 R13B.2 R15B.2 TP26B.1 U3B.3 | length 479
  Top Layer w6: TP26B.1 1863.31,1698.31 U3B.3 1864.75,1497.03 1887.03,1497.03 1914,1524 1949,1524 R15B.2 C10B.2 R13B.2
NetCON1_SH1: CON1.SH1 CON1.SH2 R2.1 | length 1796.7
  Top Layer w25: R2.1 2851.54,1693.46 3048.46,1693.46 CON1.SH1
  Bottom Layer w25: CON1.SH2 3328.07,708.07 3395,775 3395,1625 3328.07,1691.93 CON1.SH1
NetCON2_SH1: CON2.SH1 CON2.SH2 R1.1 | length 969.1
  Top Layer w25: R1.1@1230,755 CON2.SH2 R1.1@1230,763.09 ; R1.1 R1.1@1239.63,763.09
  Bottom Layer w25: CON2.SH2 1130,1017.52 1130,1382.48 CON2.SH1
NetR3B_1: R3B.1 R7B.1 TP20.1 U8.4 | length 2971.4
  Top Layer w6: U8.4 1552.4,2227.4 1525,2200 1525,1795 1555,1765 v1(2540,1765) ; R7B.1 2643.07,1416.93 2655,1405 TP20.1
  Bottom Layer w6: R3B.1 1996.93,1420 v1(2610,1420) 2640,1420 2675,1455 2675,1730 2640,1765 v1(2540,1765)
NetR5B_1: R5B.1 R12B.2 TP22.1 U9.4 | length 2359.9
  Top Layer w6: U9.4 1572.4,2027.4 1555,2010 1555,1835 1570,1820 2570,1820 2605,1785 v1(2605,1595) ; R12B.2 2638.31,1591.93 2655,1608.61 TP22.1
  Bottom Layer w6: R5B.1 2001.93,1595 v1(2605,1595)
NetR8A_1: R8A.1 U2A.6 | length 95.2
  Top Layer w6: U2A.6 2018.4,950.5 2040.59,950.5 2073.16,983.07 R8A.1
NetR8B_1: R8B.1 U2B.6 | length 93.1
  Top Layer w6: R8B.1 2153.58,1416.93 2181.06,1444.41 U2B.6
NetR13A_1: R13A.1 U2A.4 | length 161.4
  Top Layer w6: U2A.4 2018.4,899.5 2050.5,899.5 2060,890 2060,818.59 2070.52,808.07 R13A.1
NetR13B_1: R13B.1 U2B.4 | length 156.7
  Top Layer w6: R13B.1 2137.59,1579.34 2160.66,1579.34 2170,1570 2170,1510 2184.41,1495.59 U2B.4
NetU4_4: U4.4 U5.2 | length 226.8
  Top Layer w6: U4.4 1817.36,340 2008.5,340 2013.5,335 U5.2@2035,335
NetU5_3: U5.3 U6.4 | length 345.2
  Top Layer w6: U6.4 1813.58,150 1940,150 1950,160 1950,270 1965,285 U5.3@2035,285
NetU7_2: U7.2 U8.3 | length 314.1
  Top Layer w6: U8.3 1947.6,2227.4 1949.98,2225.02 1955,2220 1955,2105 1965,2095 U7.2
NetU7_3: U7.3 U9.3 | length 199.1
  Top Layer w6: U9.3 1823.46,2030 1941.26,2030 1956.26,2045 U7.3
VIN: CON2.1 CON3.1 | length 3231
  Top Layer w25: CON2.1 1376.11,1300 1358.93,1317.19 1094.64,1317.19 1080,1302.54 1080,610 1625,65 2733.5,65 2748.15,79.64 2748.15,208.15 CON3.1@2748.15,405
"X CNV": C6B.2 CON2.2 CON2.6 R6B.2 R16B.2 TP4.1 U3B.4 | length 1034.5
  Top Layer w6: CON2.6 1305,1250 1389.03,1250 1398.8,1259.77 1600,1460.97 1600,1500 TP4.1@1600,1588.19 ; TP4.1 TP4.1@1600,1588.19 ; U3B.4 1754.41,1495.59 1725,1525 R16B.2 1695.77,1529.23 1670.77,1529.23 1628.5,1571.5 1616.69,1571.5 TP4.1@1600,1588.19
  Bottom Layer w6: v1(1600,1506.5) 1618.5,1525 C6B.2 R6B.2
"X MISO": CON2.4 R3A.1 R7A.1 TP1.1 | length 670.2
  Top Layer w6: CON2.4 1565,1150 v1(1600,1115) 1600,1038.19 1616.69,1021.5 1631.28,1021.5 1669.71,983.07 R7A.1
  Bottom Layer w6: v1(1600,1115) 1638.07,1115 R3A.1
"X SCLK": C4B.2 CON2.3 CON2.7 R4B.2 R11B.2 TP3.1 U3B.6 | length 984.8
  Top Layer w6: CON2.7 1305,1200 CON2.3 1550,1200 1600,1250 v1(1600,1285) TP3.1 R11B.2 1730,1350 1740,1360 1740,1430 1754.41,1444.41 U3B.6
  Bottom Layer w6: v1(1600,1285) 1665,1350 C4B.2 R4B.2
"Y MISO": CON2.8 R5A.1 R12A.2 TP2.1 | length 939.8
  Top Layer w6: CON2.8 1327.74,1127.26 1327.74,992.26 1520,800 TP2.1 ; v1(1600,735) TP2.1 ; R12A.2 1691.93,800 TP2.1
  Bottom Layer w6: v1(1600,735) 1735,735 1775.81,775.81 1775.81,799.67 R5A.1
pads on no net: CON1.6 CON1.7 CON1.8 CON1.9 CON1.10 U1.4

## Polygon pours and split planes (outlines as drawn)
GND on Top Layer "GND" (solid, remove dead copper, pour order 0): 1000,2197.22 1000,200 ccw(c1200,200) 1200,0 3300,0 ccw(c3300,200) 3500,200 3500,2200 ccw(c3299.6,2200) 3300,2400.4 1207.78,2404.58 ccw(c1207.36,2197.22)
5V on Bottom Layer "5V" (solid, pour order 1): 1200,2400 3300,2400 cw(c3300,2200) 3500,2200 3500,200 cw(c3300,200) 3300,0 1200,0 cw(c1200,200) 1000,200 1000,2200 cw(c1200,2200)

## Silkscreen, mask and mechanical layers (free items; w line width, h text height)
Top Overlay:
  lines w10: 1530,925 1620,925 ; 1600,905 1620,925 ; 1600,945 1620,925 ; 1740,1475 1650,1475 ; 1885,925 1650,925 ; 1900,1475 2165,1475 ; 1950,90 1950,525 ; 1950,1875 1950,2310 ; 2060,925 2325,925 ; 2335,1475 2575,1475 ; 2485,925 2575,925 ; 2625,1455 2605,1475 ; 2625,1495 2605,1475 ; 2695,1475 2605,1475 ; 1500,1200 1650,1200 ; 1500,1200 1500,1750 1650,1750 ; 1500,1200 1650,1200 ; 1500,1200 1500,650 1650,650 ; 1650,650 1650,1200 ; 1650,650 2575,650 ; 1650,650 1650,925 ; 1650,925 1650,1200 ; 1650,1200 1650,1750 ; 1650,1200 2575,1200 ; 1650,1200 2575,1200 ; 1650,1200 1650,1475 ; 1650,1475 1650,1750 ; 1650,1750 2575,1750 ; 2575,650 2725,650 2725,1200 ; 2575,650 2575,1200 ; 2575,650 2575,925 ; 2575,925 2575,1200 ; 2575,1200 2725,1200 ; 2575,1200 2575,1750 ; 2575,1200 2725,1200 ; 2575,1200 2575,1475 ; 2575,1475 2575,1750 ; 2575,1750 2725,1750 2725,1200 ; 1010,1670 1430,1670 1430,1980 1010,1980 1010,1670 ; 1500,90 2575,90 2575,525 1500,525 1500,90 ; 1500,1875 2575,1875 2575,2310 1500,2310 1500,1875 ; 2715,1960 3383.53,1960 3383.53,2245 2715,2245 2715,1960
  text "Differential Receiver" at 1965,2325.41 h40
  text "SCLK+" at 2405,2225.43 h40
  text "REV20230214C" at 2740,2175 h40
  text "SCLK-" at 2405,2125.43 h40
  text "CNV+" at 2405,2025.43 h40
  text "Voltage Regulator" at 1025.02,1997.51 h40
  text "Severson Group" at 2715,1960 h125
  text "5V" at 1050,1940.43 h40
  text "3.3V" at 1190,1940.46 h40
  text "GND" at 1330,1940.43 h40
  text "CNV-" at 2405,1925.43 h40
  text "Voltage Translator" at 1482.49,1885.02 h40 r90
  text "Glitch Filters" at 1650,1770.43 h40
  text "DNP" at 1960,1635 h40 r90
  text "DNP" at 2390,1625 h40 r90
  text "CNV" at 2619.57,1580 h40 r90
  text "CNV" at 1564.57,1555 h40 r90
  text "Filtered" at 1609.59,1420 h40 r90
  text "SCLK" at 1565,1315 h40 r90
  text "SCLK" at 2619.57,1290 h40 r90
  text "DNP" at 2385,1250 h40 r90
  text "DNP" at 1960,1245 h40 r90
  text "DNP" at 1860,1085 h40 r90
  text "DNP" at 2290,1085 h40 r90
  text "X MISO" at 2619.57,1000 h40 r90
  text "X MISO" at 1565,990 h40 r90
  text "Filtered" at 2662.7,858.19 h40 r90
  text "Y MISO" at 1564.57,740.02 h40 r90
  text "Y MISO" at 2619.57,720.02 h40 r90
  text "DNP" at 1860,705 h40 r90
  text "DNP" at 2290,690 h40 r90
  text "Differential Driver" at 1970,540.41 h40
  text "X MISO+" at 2295,475.43 h40
  text "X MISO-" at 2300,375.43 h40
  text "Y MISO+" at 2305.02,275.43 h40
  text "Y MISO-" at 2310.02,175.43 h40
  text "Voltage Translator" at 1482.49,100.02 h40 r90
Bottom Overlay:
  lines w10: 1650,925 2125,925 ; 1650,1475 2125,1475 ; 3045,90 3045,525 ; 1650,750 1650,1100 2125,1100 2125,750 1650,750 ; 1650,1300 1650,1650 2125,1650 2125,1300 1650,1300 ; 2650,90 3435,90 3435,525 2650,525 2650,90 ; 2840,90 3250,90 3250,525 2840,525 2840,90
  text "Alternative Filter" at 2125.02,1675.41 h40
  text "SCLK" at 2164.57,1610 h40 r90
  text "CNV" at 2164.57,1420 h40 r90
  text "Alternative Filter" at 2120.02,1115.41 h40
  text "X MISO" at 2164.57,1070 h40 r90
  text "Y MISO" at 2164.57,894.98 h40 r90
  text "GND" at 3354.57,345 h40 r90
  text "GND" at 2959.57,340 h40 r90
  text "GND" at 3154.57,340 h40 r90
  text "24V" at 2760,330.04 h40 r90
Board Shape:
  the board outline again, w10